# EAGLE board Control board autorouter (EAGLE 9.6.2)
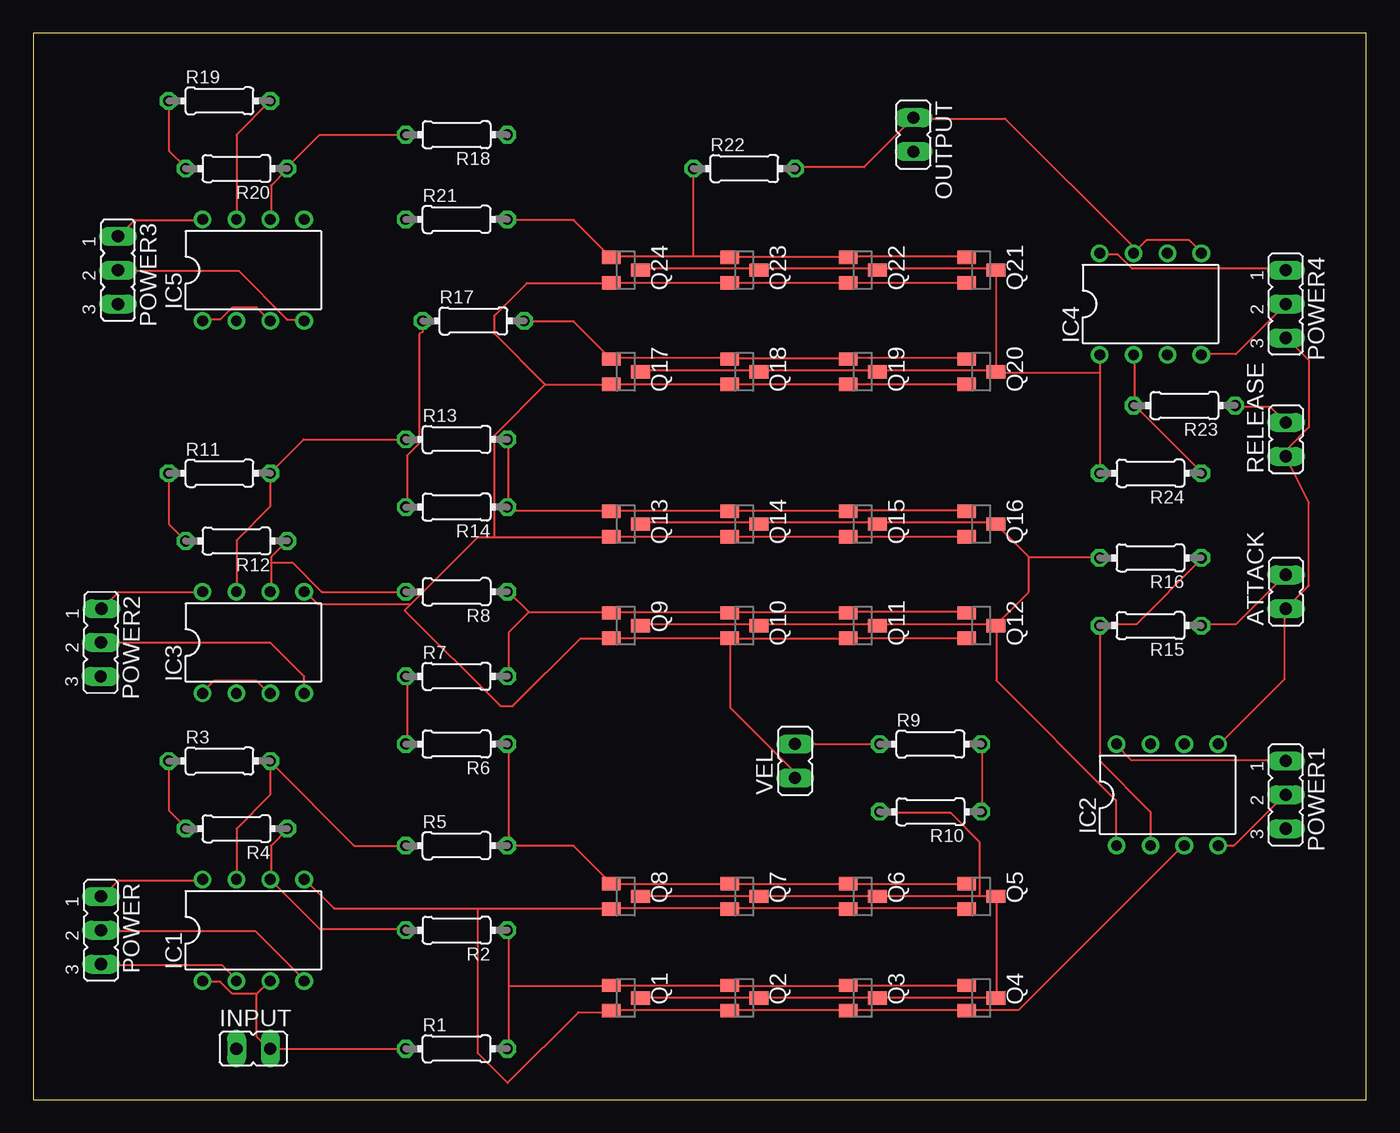
[diagram p0: board, top side]
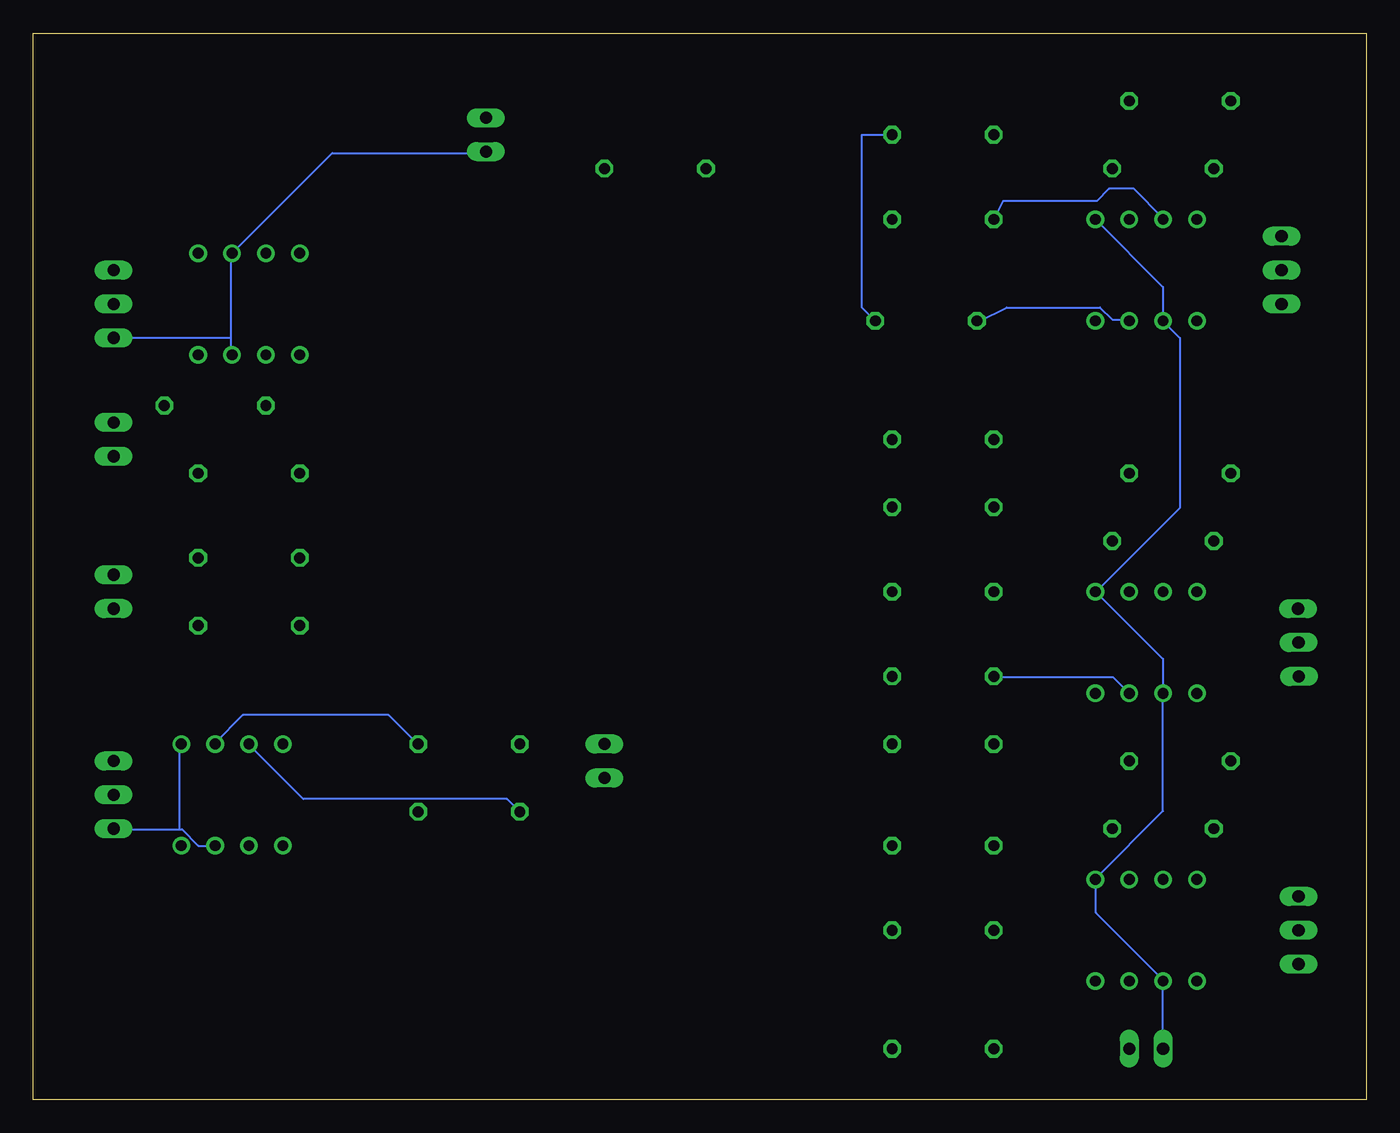
[diagram p1: board, bottom side, seen from below]

Size 100 x 80 mm. Coordinates in mm from the lower left corner, seen from the top.
Outline: 0,0 100,0 100,80 0,80 0,0
Copper layers (1*16): Top 0.035mm / dielectric 1.5mm / Bottom 0.035mm
Design rules "default": minimum track width 6mil, minimum drill 0.35mm, track to track 6mil, track to pad 6mil, pad to pad 6mil, via to via 6mil, smd to smd 6mil, copper to edge 40mil, drill to drill 6mil, minimum pad ring 10mil, minimum via ring 8mil, stop-mask expansion 4mil, vias tented up to drill 0mil, thermal gap 10mil

## Footprints (pad centres in the part's own frame; a part is rotated, then mirrored left to right if it is on the bottom)
JP1 = drill 0.914 long: 1 0,-1.27; 2 0,1.27
DIL08 = drill 0.813 pad 1.27: 1 -3.81,-3.81; 2 -1.27,-3.81; 3 1.27,-3.81; 4 3.81,-3.81; 5 3.81,3.81; 6 1.27,3.81; 7 -1.27,3.81; 8 -3.81,3.81
JP2 = drill 0.914 long: 1 -2.54,0; 2 0,0; 3 2.54,0
SOT23 = smd 1 x 1.4: 1 -0.95,-1.1; 2 0.95,-1.1; 3 0,1.1
0204/7 = drill 0.813 octagon: 1 -3.81,0; 2 3.81,0

## Placement (x,y rotation side)
ATTACK  [JP1]  93.98,38.1 0 top
IC1  LM358N  [DIL08]  16.51,12.7 0 top
IC2  LM358N  [DIL08]  85.09,22.86 0 top
IC3  LM358N  [DIL08]  16.51,34.29 0 top
IC4  LM358N  [DIL08]  83.82,59.69 0 top
IC5  LM358N  [DIL08]  16.51,62.23 0 top
INPUT  [JP1]  16.51,3.81 270 top
OUTPUT  [JP1]  66.04,72.39 180 top
POWER  [JP2]  5.08,12.7 270 top
POWER1  [JP2]  93.98,22.86 270 top
POWER2  [JP2]  5.08,34.29 269.4 top
POWER3  [JP2]  6.35,62.23 270 top
POWER4  [JP2]  93.98,59.69 270 top
Q1  MMBFJ3  [SOT23]  44.45,7.62 270 top
Q2  MMBFJ3  [SOT23]  53.34,7.62 270 top
Q3  MMBFJ3  [SOT23]  62.23,7.62 270 top
Q4  MMBFJ3  [SOT23]  71.12,7.62 270 top
Q5  MMBFJ3  [SOT23]  71.12,15.24 270 top
Q6  MMBFJ3  [SOT23]  62.23,15.24 270 top
Q7  MMBFJ3  [SOT23]  53.34,15.24 270 top
Q8  MMBFJ3  [SOT23]  44.45,15.24 270 top
Q9  MMBFJ3  [SOT23]  44.45,35.56 270 top
Q10  MMBFJ3  [SOT23]  53.34,35.56 270 top
Q11  MMBFJ3  [SOT23]  62.23,35.56 270 top
Q12  MMBFJ3  [SOT23]  71.12,35.56 270 top
Q13  MMBFJ3  [SOT23]  44.45,43.18 270 top
Q14  MMBFJ3  [SOT23]  53.34,43.18 270 top
Q15  MMBFJ3  [SOT23]  62.23,43.18 270 top
Q16  MMBFJ3  [SOT23]  71.12,43.18 270 top
Q17  MMBFJ3  [SOT23]  44.45,54.61 270 top
Q18  MMBFJ3  [SOT23]  53.34,54.61 270 top
Q19  MMBFJ3  [SOT23]  62.23,54.61 270 top
Q20  MMBFJ3  [SOT23]  71.12,54.61 270 top
Q21  MMBFJ3  [SOT23]  71.12,62.23 270 top
Q22  MMBFJ3  [SOT23]  62.23,62.23 270 top
Q23  MMBFJ3  [SOT23]  53.34,62.23 270 top
Q24  MMBFJ3  [SOT23]  44.45,62.23 270 top
R1  100  [0204/7]  31.75,3.81 0 top
R2  100  [0204/7]  31.75,12.7 180 top
R3  100  [0204/7]  13.97,25.4 0 top
R4  100  [0204/7]  15.24,20.32 180 top
R5  100  [0204/7]  31.75,19.05 0 top
R6  100  [0204/7]  31.75,26.67 180 top
R7  100  [0204/7]  31.75,31.75 0 top
R8  100  [0204/7]  31.75,38.1 180 top
R9  100k  [0204/7]  67.31,26.67 0 top
R10  100k  [0204/7]  67.31,21.59 180 top
R11  100  [0204/7]  13.97,46.99 0 top
R12  100  [0204/7]  15.24,41.91 180 top
R13  100  [0204/7]  31.75,49.53 0 top
R14  100  [0204/7]  31.75,44.45 180 top
R15  100k  [0204/7]  83.82,35.56 180 top
R16  100k  [0204/7]  83.82,40.64 180 top
R17  100  [0204/7]  33.02,58.42 0 top
R18  100  [0204/7]  31.75,72.39 180 top
R19  100  [0204/7]  13.97,74.93 0 top
R20  100  [0204/7]  15.24,69.85 180 top
R21  100  [0204/7]  31.75,66.04 0 top
R22  100  [0204/7]  53.34,69.85 0 top
R23  100k  [0204/7]  86.36,52.07 180 top
R24  100k  [0204/7]  83.82,46.99 180 top
RELEASE  [JP1]  93.98,49.53 0 top
VEL  [JP1]  57.15,25.4 0 top

## Library data of the parts
ATTACK INPUT OUTPUT POWER POWER1-POWER4 RELEASE VEL = jumper
IC1-IC5 = linear
Q1-Q24 = transistor-small-signal
R1-R24 = rcl; SPICEPREFIX: R

## Nets
22: Q13.1 Q14.1 Q15.1 Q16.1 R13.2 R14.1
CONTROL: IC2.7 Q1.3 Q2.3 Q3.3 Q4.3 Q5.3 Q6.3 Q7.3 Q8.3 R10.2
CONTROL1: IC2.1 Q9.3 Q10.3 Q11.3 Q12.3 Q13.3 Q14.3 Q15.3 Q16.3 R16.2
CONTROL2: IC4.1 Q17.3 Q18.3 Q19.3 Q20.3 Q21.3 Q22.3 Q23.3 Q24.3 R24.2
GND: ATTACK.1 IC1.2 IC1.5 IC2.3 IC2.5 IC3.2 IC3.5 IC4.3 IC4.6 IC5.2 IC5.5 INPUT.1 OUTPUT.2 POWER1.3 POWER4.3 POWER.3 Q1.2 Q2.2 Q3.2 Q4.2 Q5.2 Q6.2 Q7.2 Q8.2 Q9.2 Q10.2 Q11.2 Q12.2 Q13.2 Q14.2 Q15.2 Q16.2 Q17.2 Q18.2 Q19.2 Q20.2 Q21.2 Q22.2 Q23.2 Q24.2 RELEASE.1 VEL.1
N$1: IC4.8 POWER4.1
N$2: IC1.8 POWER.1
N$3: IC1.6 R2.2 R4.1
N$4: IC1.1 IC1.3 INPUT.2 R1.1
N$5: R3.1 R4.2
N$6: IC4.4 POWER4.2
N$7: IC1.7 R3.2 R5.1
N$8: R9.1 VEL.2
N$9: IC3.1 IC3.3 R6.2 R7.1
N$11: IC5.8 POWER3.1
N$12: IC2.6 R9.2 R10.1
N$13: IC4.5 IC4.7 OUTPUT.1 R22.2
N$14: IC5.4 POWER3.2
N$15: IC3.6 R8.2 R12.1
N$16: R11.1 R12.2
N$17: IC3.7 R11.2 R13.1
N$18: IC3.8 POWER2.1
N$19: IC5.1 IC5.3 R14.2 R17.1
N$20: ATTACK.2 R15.1
N$21: IC2.2 R15.2 R16.1
N$22: IC3.4 POWER2.2
N$23: IC2.8 POWER1.1
N$24: IC1.4 POWER.2
N$25: IC2.4 POWER1.2
N$26: IC5.6 R18.2 R20.1
N$27: R19.1 R20.2
N$28: IC5.7 R19.2 R21.1
N$31: R23.1 RELEASE.2
N$32: IC4.2 R23.2 R24.1
NET11: Q1.1 Q2.1 Q3.1 Q4.1 R1.2 R2.1
NET12: Q5.1 Q6.1 Q7.1 Q8.1 R5.2 R6.1
NET21: Q9.1 Q10.1 Q11.1 Q12.1 R7.2 R8.1
NET31: Q17.1 Q18.1 Q19.1 Q20.1 R17.2 R18.1
NET32: Q21.1 Q22.1 Q23.1 Q24.1 R21.2 R22.1

## Tracks (layer width: path | path; a pad name or v marks a point on that pad's centre or on a via)
22
  Top 0.152: Q16.1 69.95,44.2 61.27,44.2 Q15.1 61.11,44.2 52.27,44.2 Q14.1 52.12,44.2 43.43,44.2 Q13.1 43.28,44.2 35.81,44.2 R14.1 35.66,44.5 35.66,49.53 R13.2
CONTROL
  Top 0.152: Q1.3 Q2.3 Q3.3 Q4.3 72.24,7.62 72.24,15.24 Q5.3 71.02,15.24 | Q8.3 Q7.3 Q6.3 71.02,15.24 | 71.02,15.24 71.02,19.3 68.83,21.49 63.55,21.49 R10.2
  Bottom 0.152: IC2.7 83.82,26.62 79.76,22.55 64.47,22.55 R10.2
CONTROL1
  Top 0.152: Q13.3 45.57,43.28 54.41,43.28 Q14.3 54.56,43.28 63.25,43.28 Q15.3 63.4,43.28 72.08,43.28 Q16.3 72.24,43.13 74.68,40.69 | 74.68,40.69 80.01,40.69 R16.2 | Q9.3 45.57,35.66 54.41,35.66 Q10.3 54.56,35.66 63.25,35.66 Q11.3 63.4,35.66 72.08,35.66 Q12.3 | IC2.1 81.23,19.05 81.23,22.45 72.24,31.45 72.24,35.51 Q12.3 | 74.68,40.69 74.68,38.1 72.24,35.66 Q12.3
CONTROL2
  Top 0.152: Q24.3 45.57,62.33 54.41,62.33 Q23.3 54.56,62.33 63.25,62.33 Q22.3 63.4,62.33 72.08,62.33 Q21.3 72.24,62.18 72.24,54.71 Q20.3 | IC4.1 80.01,54.56 | 80.01,54.56 R24.2 | Q17.3 45.57,54.71 54.41,54.71 Q18.3 54.56,54.71 63.25,54.71 Q19.3 63.4,54.71 72.08,54.71 Q20.3 | 80.01,54.56 72.24,54.56 Q20.3
GND
  Top 0.152: POWER4.3 94.03,57.15 95.71,55.47 95.71,50.44 94.03,48.77 94.03,48.31 RELEASE.1 95.71,44.81 95.71,38.56 ATTACK.1 93.88,36.73 93.88,31.55 89,26.67 IC2.5 | IC2.3 86.26,19.05 73.91,6.71 70.1,6.71 Q4.2 69.95,6.71 61.27,6.71 Q3.2 61.11,6.71 52.27,6.71 Q2.2 52.12,6.71 43.43,6.71 Q1.2 43.28,6.55 40.89,6.55 35.59,1.25 33.33,3.5 33.33,14.33 | Q12.2 69.95,34.59 61.27,34.59 Q11.2 61.11,34.59 52.27,34.59 | VEL.1 57.15,24.54 52.27,29.41 52.27,34.59 | 52.27,34.59 Q10.2 52.12,34.59 43.43,34.59 Q9.2 43.28,34.59 41.05,34.59 35.97,29.52 35.05,29.52 27.86,36.7 28.35,37.19 | Q21.2 69.95,61.27 61.27,61.27 Q22.2 61.11,61.27 52.27,61.27 Q23.2 52.12,61.27 43.43,61.27 Q24.2 43.28,61.27 37.03,61.27 34.59,58.83 34.59,57.45 38.41,53.65 | Q20.2 69.95,53.65 61.27,53.65 Q19.2 61.11,53.65 52.27,53.65 Q18.2 52.12,53.65 43.43,53.65 Q17.2 43.28,53.65 38.41,53.65 | Q16.2 69.95,42.22 61.27,42.22 Q15.2 61.11,42.22 52.27,42.22 Q14.2 52.12,42.22 43.43,42.22 Q13.2 43.28,42.22 34.59,42.22 | Q5.2 69.95,14.33 61.27,14.33 Q6.2 61.11,14.33 52.27,14.33 Q7.2 52.12,14.33 43.43,14.33 Q8.2 43.28,14.33 33.33,14.33 | POWER.3 5.18,10.06 14.17,10.06 15.24,8.99 IC1.2 | 33.33,14.33 22.55,14.33 20.42,16.46 IC1.5 | 34.59,42.22 33.38,42.22 28.35,37.19 | 28.35,37.19 21.34,37.19 20.42,38.1 IC3.5 | 38.41,53.65 34.59,49.84 34.59,42.22
  Bottom 0.152: 85.19,57.15 85.19,63.4 IC4.6 77.57,71.02 66.14,71.02 OUTPUT.2 | 85.19,57.15 85.19,55.93 IC4.3 | 85.19,57.15 POWER4.3 | IC2.3 87.63,19.05 88.85,20.27 89,20.27 | 89,20.27 93.88,20.27 POWER1.3 | 89,20.27 89,26.67 IC2.5 | IC5.5 15.24,60.96 IC5.2 13.97,57.15 13.97,44.4 20.27,38.1 | 20.27,38.1 15.24,33.07 IC3.2 15.24,21.64 20.27,16.61 IC1.5 20.27,16.46 20.27,14.02 15.24,8.99 IC1.2 INPUT.1 | 20.27,38.1 IC3.5
N$1
  Top 0.152: IC4.8 80.01,63.4 81.38,63.4 82.45,62.33 93.88,62.33 POWER4.1
N$2
  Top 0.152: IC1.8 12.65,16.46 6.4,16.46 5.18,15.24 POWER.1
N$3
  Top 0.152: R4.1 19.05,20.27 17.83,19.05 17.83,16.61 IC1.6 21.49,12.8 27.89,12.8 R2.2
N$4
  Top 0.152: 16.76,7.92 14.94,7.92 14.02,8.84 12.8,8.84 IC1.1 | 16.76,7.92 17.68,8.84 IC1.3 | R1.1 INPUT.2 17.68,3.81 16.76,4.72 16.76,7.92
N$5
  Top 0.152: R3.1 10.21,25.3 10.21,21.64 11.43,20.42 R4.2
N$6
  Top 0.152: POWER4.2 90.22,55.93 87.63,55.93 IC4.4
N$7
  Top 0.152: IC1.7 15.24,20.32 17.78,22.86 R3.2 17.83,25.3 24.08,19.05 R5.1
N$8
  Top 0.152: VEL.2 R9.1
N$9
  Top 0.152: IC3.1 12.7,30.58 13.51,31.39 16.76,31.39 17.68,30.48 IC3.3 | R6.2 28.04,26.67 28.04,31.7 R7.1
  Bottom 0.152: IC3.3 19,31.7 27.89,31.7 R7.1
N$11
  Top 0.152: IC5.8 12.65,65.99 7.62,65.99 6.4,64.77 POWER3.1
N$12
  Top 0.152: R10.1 71.17,21.64 71.17,26.67 R9.2
  Bottom 0.152: IC2.6 86.36,26.77 84.28,28.85 73.36,28.85 71.17,26.67 R9.2
N$13
  Top 0.152: IC4.5 87.63,63.55 86.72,64.47 83.52,64.47 IC4.7 82.55,63.96 72.9,73.61 66.14,73.61 OUTPUT.1 62.33,69.95 57.15,69.95 R22.2
N$14
  Top 0.152: IC5.4 20.27,58.52 19.05,58.52 15.39,62.18 6.4,62.18 POWER3.2
N$15
  Top 0.152: 17.83,40.28 17.83,40.69 R12.1 | 17.83,40.28 17.83,38.1 IC3.6 | R8.2 21.64,38.1 19.46,40.28 17.83,40.28
N$16
  Top 0.152: R12.2 10.21,43.13 10.21,46.94 R11.1
N$17
  Top 0.152: IC3.7 15.24,41.96 17.78,44.5 R11.2 17.83,47.09 20.27,49.53 R13.1
N$18
  Top 0.152: IC3.8 6.4,38.1 5.18,36.88 POWER2.1
N$19
  Top 0.152: IC5.3 16.76,59.44 14.94,59.44 14.02,58.52 12.8,58.52 IC5.1 | R14.2 28.04,44.5 28.04,48.31 28.96,49.23 28.96,57.45 29.21,57.58 R17.1
  Bottom 0.152: IC5.3 17.83,58.52 19.05,58.52 19.96,59.44 26.98,59.44 29.01,58.42 R17.1
N$20
  Top 0.152: R15.1 87.63,35.66 90.22,35.66 93.88,39.32 ATTACK.2
N$21
  Top 0.152: R16.1 87.63,40.54 82.75,35.66 80.01,35.66 R15.2 80.01,25.4 83.82,21.59 IC2.2
N$22
  Top 0.152: IC3.4 20.32,31.75 17.78,34.29 POWER2.2
N$23
  Top 0.152: IC2.8 81.28,26.57 82.4,25.45 93.88,25.45 POWER1.1
N$24
  Top 0.152: IC1.4 20.32,8.99 16.66,12.65 5.18,12.65 POWER.2
N$25
  Top 0.152: IC2.4 90.07,19.05 93.88,22.86 POWER1.2
N$26
  Top 0.152: IC5.6 17.83,66.14 17.83,68.58 19.05,69.8 R20.1 19.05,69.95 21.49,72.39 R18.2
N$27
  Top 0.152: R19.1 10.21,74.83 10.21,71.17 11.43,69.95 R20.2
N$28
  Top 0.152: IC5.7 15.24,72.39 R19.2
  Bottom 0.152: R21.1 27.25,67.41 20.22,67.41 19.3,68.33 17.42,68.33 15.24,66.14 IC5.7
N$31
  Top 0.152: RELEASE.2 92.81,51.97 90.22,51.97 R23.1
N$32
  Top 0.152: 82.6,52.12 82.6,55.78 IC4.2 | 82.6,52.12 87.63,47.09 R24.1 | 82.6,52.12 R23.2
NET11
  Top 0.152: Q4.1 69.95,8.53 61.27,8.53 Q3.1 61.11,8.53 52.27,8.53 Q2.1 52.12,8.53 43.43,8.53 Q1.1 43.28,8.53 35.66,8.53 | 35.66,8.53 35.66,12.65 R2.1 | 35.66,8.53 35.66,3.81 R1.2
NET12
  Top 0.152: 35.66,19.05 35.66,26.67 R6.1 | Q5.1 69.95,16.15 61.27,16.15 Q6.1 61.11,16.15 52.27,16.15 Q7.1 52.12,16.15 43.43,16.15 Q8.1 43.28,16.31 40.54,19.05 35.66,19.05 | 35.66,19.05 R5.2
NET21
  Top 0.152: Q12.1 69.95,36.58 61.27,36.58 Q11.1 61.11,36.58 52.27,36.58 Q10.1 52.12,36.58 43.43,36.58 Q9.1 43.28,36.58 37.19,36.58 | 37.19,36.58 35.66,38.1 R8.1 | 37.19,36.58 35.66,35.05 35.66,31.85 R7.2
NET31
  Top 0.152: Q20.1 69.95,55.63 61.27,55.63 Q19.1 61.11,55.63 52.27,55.63 Q18.1 52.12,55.63 43.43,55.63 Q17.1 43.28,55.63 40.54,58.37 36.93,58.37 R17.2
  Bottom 0.152: R17.2 37.85,59.44 37.85,72.39 R18.1
NET32
  Top 0.152: Q21.1 69.95,63.25 61.27,63.25 Q22.1 61.11,63.25 52.27,63.25 Q23.1 52.12,63.25 49.53,63.25 | 49.53,63.25 43.43,63.25 Q24.1 43.28,63.25 40.54,65.99 35.66,65.99 R21.2 | 49.53,63.25 R22.1